# EAGLE board pwm-board (EAGLE 4.16)
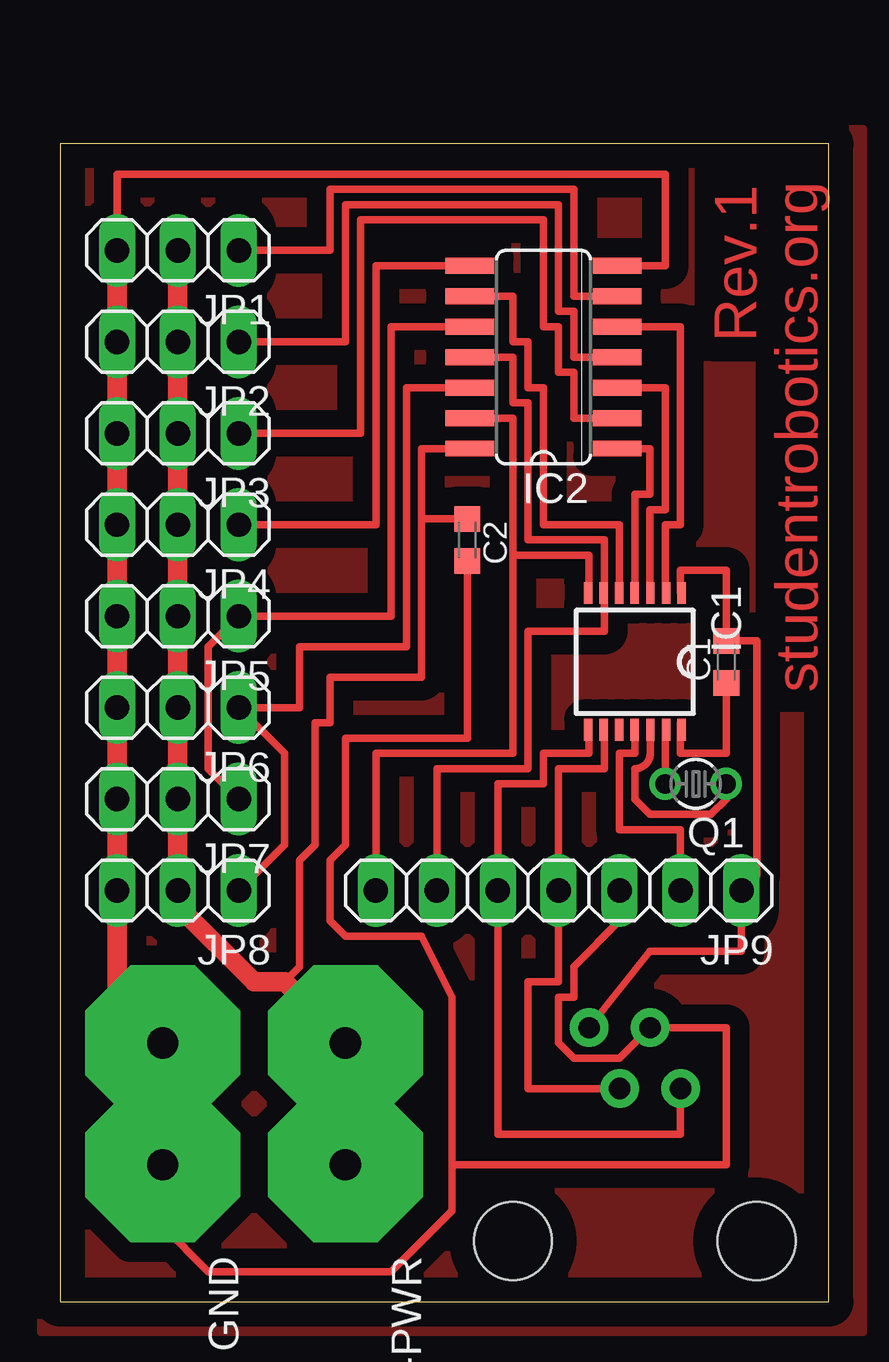
[diagram p0: board, top side]
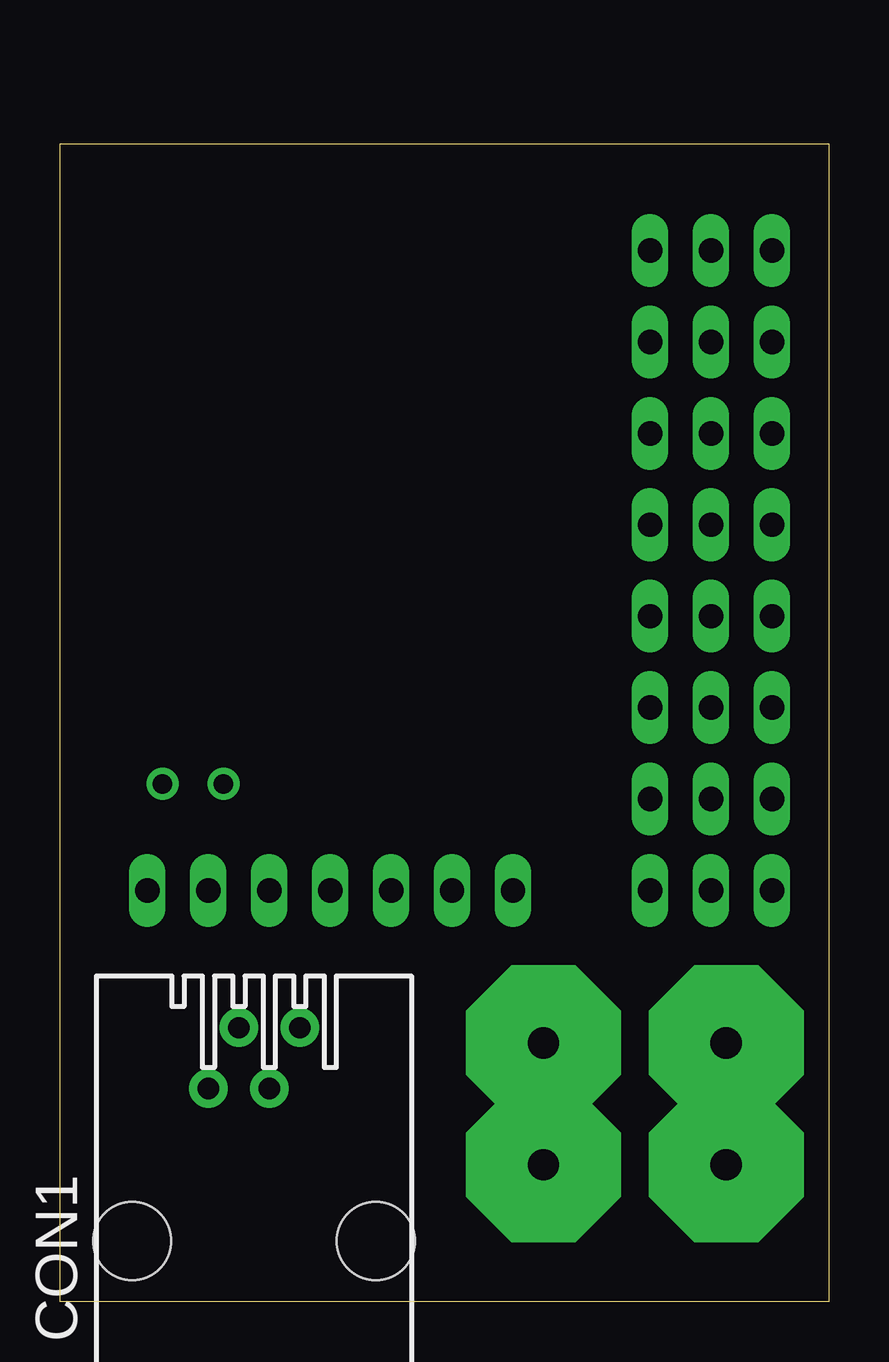
[diagram p1: board, bottom side, seen from below]

Size 32.05 x 48.25 mm. Coordinates in mm from the lower left corner, seen from the top.
Outline: 0,0 32.05,0 32.05,48.25 0,48.25 0,0
Copper layers (1*16): Top 0.035mm / dielectric 1.5mm / Bottom 0.035mm
Design rules "default": minimum track width 10mil, minimum drill 24mil, track to track 8mil, track to pad 8mil, pad to pad 8mil, via to via 8mil, smd to smd 8mil, copper to edge 40mil, drill to drill 8mil, minimum pad ring 10mil, minimum via ring 8mil, stop-mask expansion 4mil, vias tented up to drill 0mil, thermal gap 10mil

## Footprints (pad centres in the part's own frame; a part is rotated, then mirrored left to right if it is on the bottom)
C0603K = smd 1.05 x 1.08: 1 -0.875,0; 2 0.875,0
RJ11 = drill 0.889 pad 1.6 round: 1 1.905,7.62; 2 0.635,5.08; 3 -0.635,7.62; 4 -1.905,5.08 | hole 3.251: -5.08,-1.27; 5.08,-1.27
SPADE = drill 1.3 pad 6.452 octagon: P$1 -5.08,-3.175; P$2 0,-3.175
TSSOP14 = smd 0.9 x 0.35: 1 -2.875,1.95; 2 -2.875,1.3; 3 -2.875,0.65; 4 -2.875,0; 5 -2.875,-0.65; 6 -2.875,-1.3; 7 -2.875,-1.95; 8 2.825,-1.95; 9 2.825,-1.3; 10 2.825,-0.65; 11 2.825,0; 12 2.825,0.65; 13 2.825,1.3; 14 2.825,1.95
SO14 = smd 0.66 x 2.032: 1 -3.81,-3.073; 2 -2.54,-3.073; 3 -1.27,-3.073; 4 0,-3.073; 5 1.27,-3.073; 6 2.54,-3.073; 7 3.81,-3.073; 8 3.81,3.073; 9 2.54,3.073; 10 1.27,3.073; 11 0,3.073; 12 -1.27,3.073; 13 -2.54,3.073; 14 -3.81,3.073
1X03 = drill 1.016 long: 1 -2.54,0; 2 0,0; 3 2.54,0
1X07 = drill 1.016 long: 1 -7.62,0; 2 -5.08,0; 3 -2.54,0; 4 0,0; 5 2.54,0; 6 5.08,0; 7 7.62,0
TC26V = drill 0.813 round: 1 -1.27,0; 2 1.27,0

## Placement (x,y rotation side)
C1  [C0603K]  27.77,26.66 90 top
C2  [C0603K]  16.98,31.74 270 top
CON1  MODULE_CON  [RJ11]  23.96,3.8 0 bottom
GND  4.8X0.8-SPADE  [SPADE]  7.46,5.71 270 top
IC1  MSP430F2013IPW  [TSSOP14]  23.96,26.66 270 top
IC2  74ACT04D  [SO14]  20.15,39.37 90 top
JP1  [1X03]  4.92,43.81 180 top
JP2  [1X03]  4.92,40 180 top
JP3  [1X03]  4.92,36.19 180 top
JP4  [1X03]  4.92,32.38 180 top
JP5  [1X03]  4.92,28.57 180 top
JP6  [1X03]  4.92,24.76 180 top
JP7  [1X03]  4.92,20.95 180 top
JP8  [1X03]  4.92,17.14 180 top
JP9  [1X07]  20.79,17.14 180 top
Q1  [TC26V]  26.5,21.58 180 top
SERVO-PWR  4.8X0.8-SPADE  [SPADE]  15.08,5.71 270 top

## Library data of the parts
C1 C2 = rcl
CON1 IC1 = ecssr
GND SERVO-PWR = ecssr-Pwr
IC2 = 74xx-eu
JP1-JP9 = pinhead
Q1 = crystal

## Nets
+3V3: C1.2 CON1.1 IC1.1 JP9.1
GND: C2.2 CON1.3 GND.P$1 IC2.7 JP1.3 JP2.3 JP3.3 JP4.3 JP5.3 JP6.3 JP7.3 JP8.3 JP9.3
N$3: CON1.2 IC1.9 JP9.4
N$6: IC1.2 IC2.5
N$7: IC1.12 Q1.1
N$8: IC1.13 Q1.2
N$9: C1.1 IC1.14
N$10: IC1.3 IC2.3
N$11: IC1.4 IC2.1
N$12: IC1.5 IC2.9
N$13: IC1.6 IC2.11 JP9.6
N$14: IC1.7 IC2.13 JP9.7
N$15: IC2.6 JP1.1
N$16: IC2.4 JP2.1
N$17: IC2.2 JP3.1
N$18: IC2.10 JP5.1 JP7.1
N$19: IC2.8 JP4.1
N$20: CON1.4 IC1.8 JP9.5
N$21: IC2.12 JP6.1 JP8.1
N$22: IC1.11 JP9.2
VCC: C2.1 IC2.14 JP1.2 JP2.2 JP3.2 JP4.2 JP5.2 JP6.2 JP7.2 JP8.2 SERVO-PWR.P$1

## Tracks (layer width: path | path; a pad name or v marks a point on that pad's centre or on a via)
+3V3
  Top 0.305: IC1.1 25.87,29.54 25.87,30.47 27.77,30.47 C1.2 29.04,27.54 29.04,17.77 JP9.1 28.41,14.6 24.6,14.6 CON1.1
GND
  Top 0.305: IC2.7 25.23,43.18 25.23,46.98 2.38,46.98 JP1.3 | C2.2 16.98,23.49 11.9,23.49 11.9,19.04 11.27,18.41 11.27,15.87 11.9,15.24 15.08,15.24 16.34,12.7 16.34,5.71 | 16.34,5.71 16.34,3.8 13.81,1.27 6.18,1.27 4.28,3.17 GND.P$1 | JP9.3 23.33,15.87 21.42,13.97 21.42,12.7 20.79,12.7 20.79,10.79 21.42,10.16 23.33,10.16 CON1.3 27.77,11.43 27.77,5.71 16.34,5.71
  Top 0.813: JP1.3 JP2.3 JP3.3 JP4.3 JP5.3 JP6.3 JP7.3 JP8.3 2.38,12.7 GND.P$1
N$1
  pour Top (isolate 0.813): -0.8,48.89 -0.8,-1.27 33.49,-1.27 33.49,48.89 1.74,48.89
N$3
  Top 0.305: IC1.9 22.7,23.84 22.7,22.22 20.79,22.22 JP9.4 20.79,13.33 19.52,13.33 19.52,8.89 CON1.2
N$6
  Top 0.305: IC2.5 25.87,40.64 25.87,32.38 25.23,32.38 25.23,29.54 IC1.2
N$7
  Top 0.305: Q1.1 27.77,20.95 27.14,20.31 24.6,20.31 23.96,20.95 23.96,22.22 arc90 24.61,22.87 IC1.12
N$8
  Top 0.305: IC1.13 25.23,23.84 Q1.2
N$9
  Top 0.305: C1.1 27.77,22.86 25.87,22.86 25.87,23.84 | 25.87,23.84 25.87,24.12 | 25.87,23.84 IC1.14
N$10
  Top 0.305: IC2.3 25.23,38.1 25.23,33.02 24.6,33.02 IC1.3
N$11
  Top 0.305: IC2.1 24.6,35.55 24.6,33.65 23.96,33.65 IC1.4
N$12
  Top 0.305: IC2.9 18.88,41.91 18.88,40 19.52,40 19.52,38.1 20.15,38.1 20.15,32.38 23.33,32.38 IC1.5
N$13
  Top 0.305: IC2.11 18.88,39.37 18.88,37.46 19.52,37.46 19.52,31.74 22.7,31.74 22.7,29.54 | 22.7,29.54 IC1.6 | 22.7,29.54 22.7,27.93 19.52,27.93 19.52,22.22 15.71,22.22 JP9.6
N$14
  Top 0.305: IC2.13 18.88,36.83 18.88,31.11 | IC1.7 22.06,29.54 22.06,31.11 18.88,31.11 | JP9.7 13.17,22.86 18.88,22.86 18.88,31.11
N$15
  Top 0.305: IC2.6 21.42,41.91 21.42,46.35 11.27,46.35 11.27,43.81 JP1.1
N$16
  Top 0.305: IC2.4 21.42,39.37 21.42,41.27 20.79,41.27 20.79,45.72 11.9,45.72 11.9,40 JP2.1
N$17
  Top 0.305: IC2.2 21.42,36.83 21.42,38.73 20.79,38.73 20.79,40.64 20.15,40.64 20.15,45.08 12.54,45.08 12.54,36.19 JP3.1
N$18
  Top 0.305: IC2.10 13.81,40.64 13.81,28.57 JP5.1 6.18,27.3 6.18,22.22 JP7.1
N$19
  Top 0.305: 16.98,43.18 13.17,43.18 13.17,32.38 JP4.1
  Top 0.406: 16.98,43.18 IC2.8
N$20
  Top 0.305: IC1.8 22.06,23.84 22.06,22.86 20.15,22.86 20.15,21.58 18.25,21.58 JP9.5 18.25,6.98 25.87,6.98 CON1.4
N$21
  Top 0.305: IC2.12 14.44,38.1 14.44,27.3 10,27.3 10,24.76 JP6.1 9.36,22.86 9.36,19.04 JP8.1
N$22
  Top 0.305: JP9.2 25.87,19.68 23.33,19.68 23.33,22.86 23.96,22.86 IC1.11
VCC
  Top 0.305: 15.08,32.62 15.08,35.55 IC2.14 | 15.08,32.62 C2.1 | 15.08,32.62 15.08,26.03 11.27,26.03 11.27,24.12 10.63,24.12 10.63,19.04 10,18.41 10,13.97 9.36,13.33
  Top 0.813: JP1.2 JP2.2 JP3.2 JP4.2 JP5.2 JP6.2 JP7.2 JP8.2 4.92,16.5 8.09,13.33 9.36,13.33 SERVO-PWR.P$1

## Text on the board
Top: Rev.1 | studentrobotics.org